# Altium PCB PCB1.PcbDoc
Units mil, origin at the board's own origin, x right, y up, seen from the top; angles counter-clockwise.
Board outline 1080.03 x 2490.03 mil, 2 copper layers (Top Layer, Bottom Layer); 17 components, 9 nets, 97 pads, 7 vias.
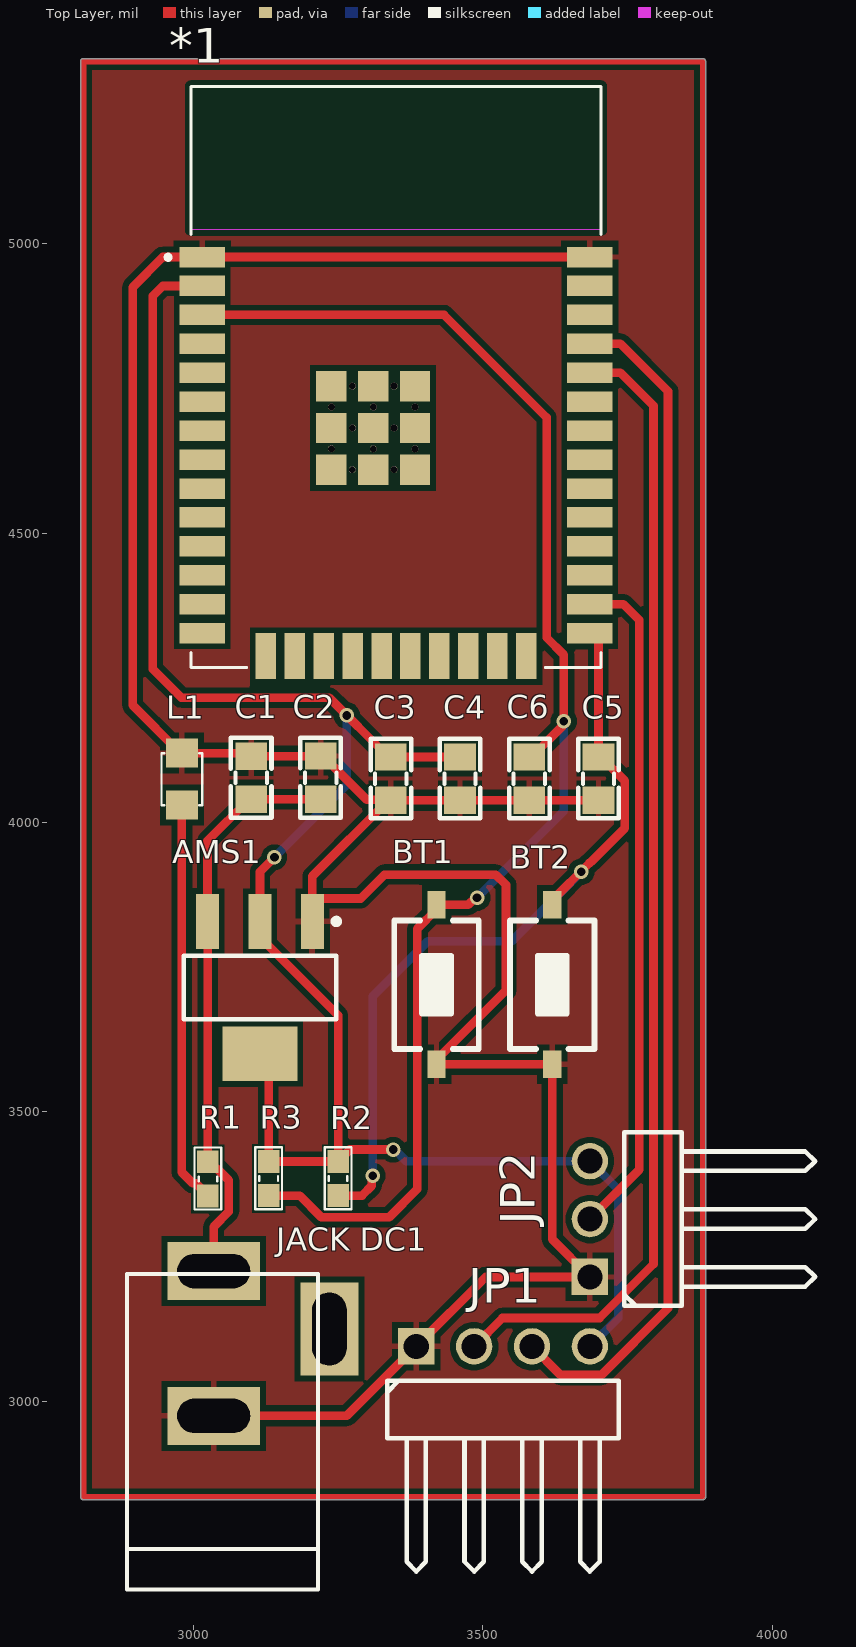
[diagram p0: Top Layer view]
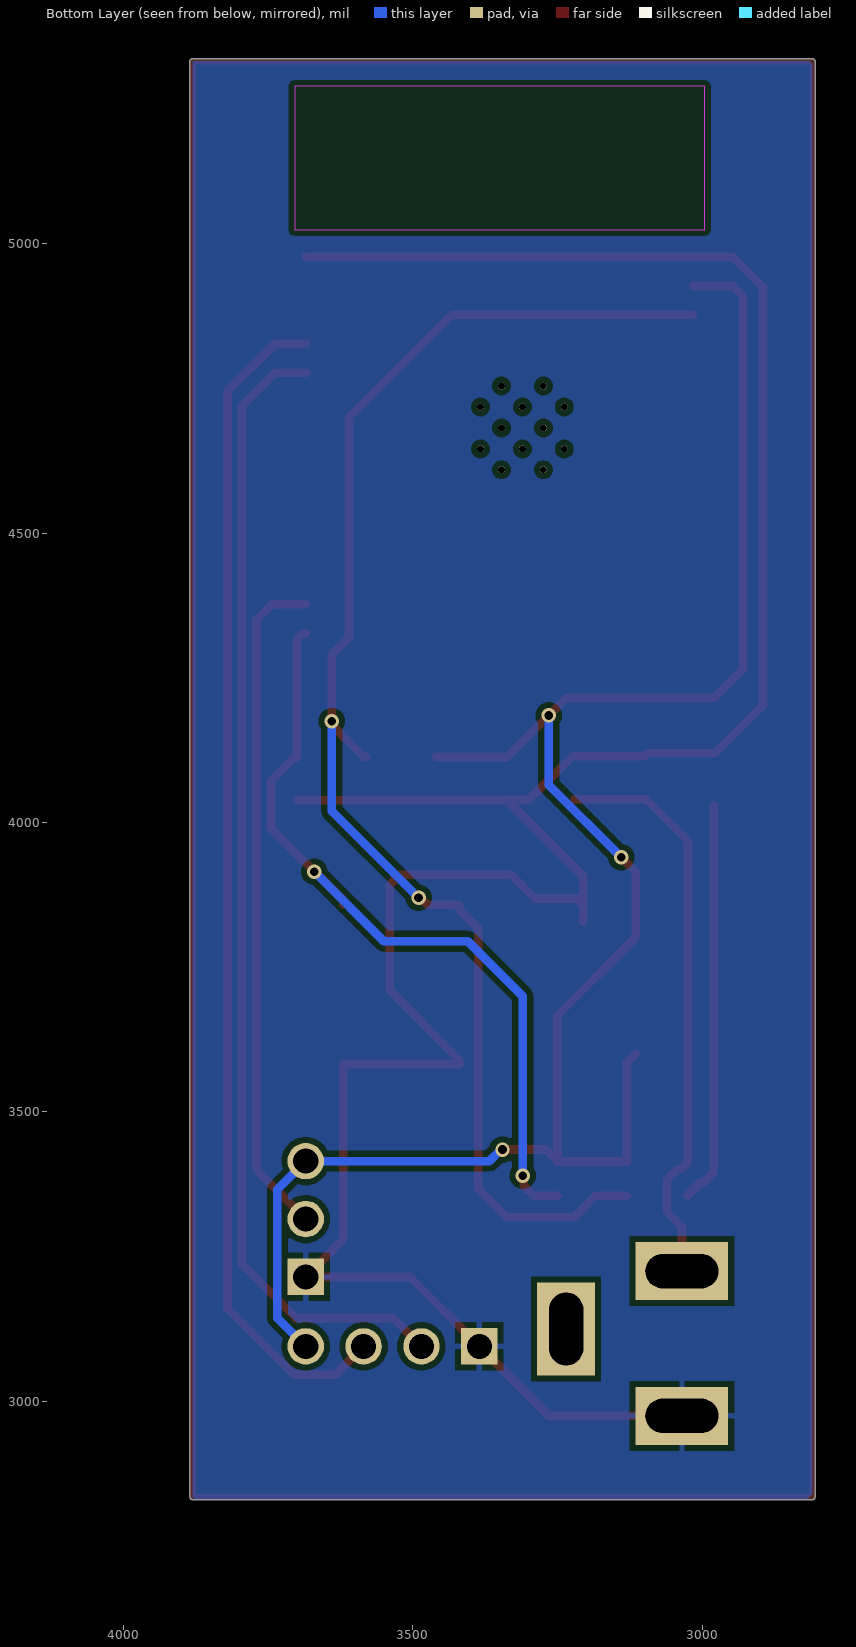
[diagram p1: Bottom Layer view, seen from below]
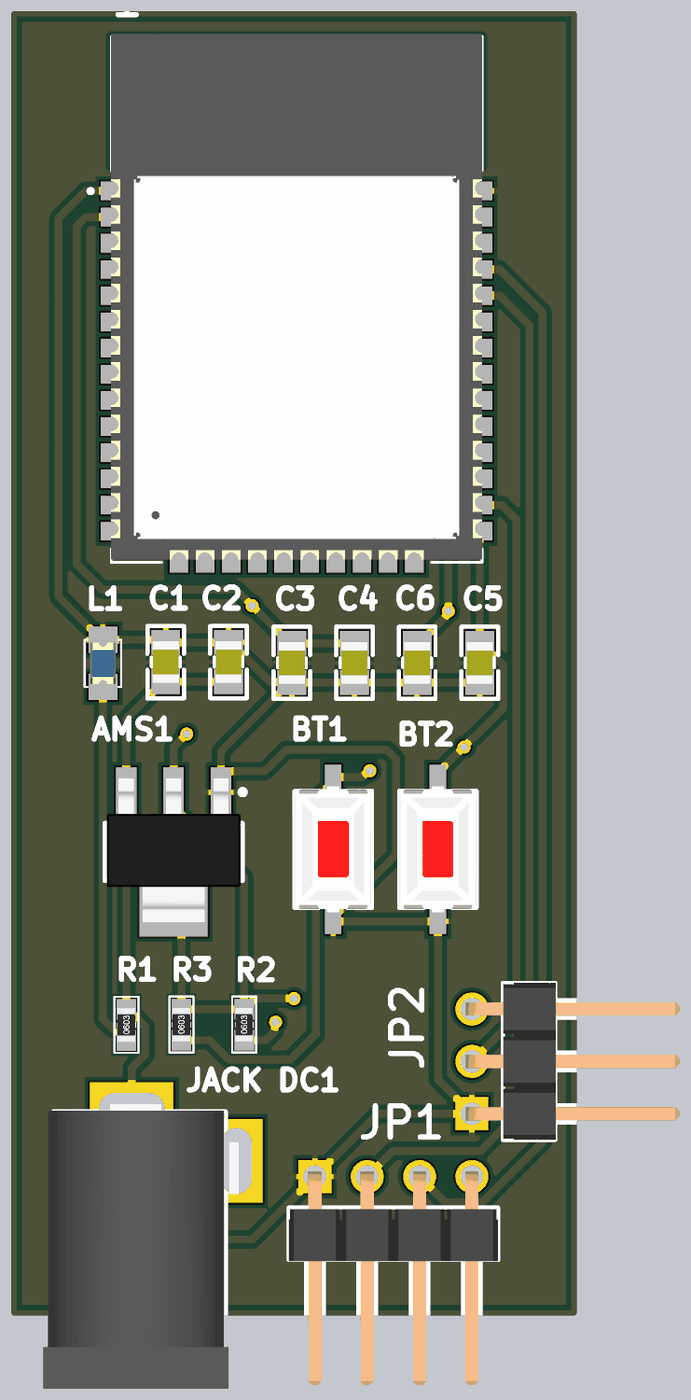
[diagram p2: 3D render of the assembled board from above, using the file's embedded part models]

## Layer stack, top to bottom
Top Solder: solder mask 0.4, Solder Resist, Dk 3.5
Top Layer: signal copper 1.4
Dielectric 1: dielectric 12.6, FR-4, Dk 4.8
Bottom Layer: signal copper 1.4
Bottom Solder: solder mask 0.4, Solder Resist, Dk 3.5

## Board outline
2810,2829.99 cw(c2810,2835) 2804.99,2835 2804.99,5315 cw(c2810,5315) 2810,5320.02 3880,5320.02 cw(c3880,5315) 3885.01,5315 3885.01,2835 cw(c3880,2835) 3880,2829.99

## Design rules (kind name [scope] priority, off if disabled: settings)
Clearance [All] p1: gap=10 ignorepadtopadclearanceinfootprint=FALSE
PolygonConnect [All] p1: connectstyle=Relief reliefconductorwidth=10 reliefentries=4 polygonreliefangle="90 Angle" airgapwidth=10
RoutingVias [All] p1: holewidth=28 width=50 viastyle="Through Hole" minholewidth=15 minwidth=25 maxholewidth=45 maxwidth=45
SolderMaskExpansion [All] p1: expansion=4 istentingtop=FALSE
Width [All] p1: maxlimit=50 minlimit=15 preferedwidth=25
30 further rules are at their usual default settings.

## Classes and differential pairs
component class Sheet1: *1 AMS1 BT1 BT2 C4 "JACK DC1" JP1 JP2 L1 R1 R2 R3

## Components (designator, comment, footprint, x,y, rotation, side; value= is the part's Value field where it differs from the comment)
*1 "ESP32 WROOM 32" ESP32-WROOM-32D 3350,4770 r0 top
AMS1 "AMS1117-3.3V" SOT223 3115,3715 r180 top value="AMS1117-3.3V SOT223"
BT1 "Nut Nhan 2 Chan SMD 3x6x2.5" "Nut Nhan 2 Chan SMD 3x6x2.5" 3420,3720 r90 top
BT2 "Nut Nhan 2 Chan SMD 3x6x2.5" "Nut Nhan 2 Chan SMD 3x6x2.5" 3620,3720 r90 top
C1 "106" "tu 0805" 3099.87,4077.23 r90 top
C2 "104" "tu 0805" 3219.87,4077.43 r90 top
C3 "106" "tu 0805" 3341.04,4076.06 r270 top
C4 "104" "tu 0805" 3460.73,4076.06 r270 top
C5 "104" "tu 0805" 3700.13,4076.06 r270 top
C6 "104" "tu 0805" 3580.43,4076.06 r270 top
"JACK DC1" "JACK DC 5.5" "JACK DC 5.5" 3135,3100 r90 top value="Jac DC"
JP1 "JP 1x4 2.54" "JP 1x4 DC" 3735,2995 r0 top
JP2 "JP 1x3 2.54" "JP 1x3 DC" 3785,3465 r90 top
L1 "LED 0805" LED-0805-Blue 2980,4030 r90 top
R1 "1k" "tro smd 0603" 3025,3384.53 r90 top
R2 "10k" "tro smd 0603" 3250,3385 r90 top
R3 "10k" "tro smd 0603" 3130,3385 r90 top

## Footprints (in the part's own frame and the unit in brackets; to place one, negate y for a bottom-side part, rotate by r counter-clockwise, add the part's x,y. Pads: shape width x height; smd on the part's side, far side on the other; paste and mask are expansions set on the pad)
ESP32-WROOM-32D [mm]
  rect 2x0.9 smd: 1(-8.5,5.26) 2(-8.5,3.99) 3(-8.5,2.72) 4(-8.5,1.45) 5(-8.5,0.18) 6(-8.5,-1.09) 7(-8.5,-2.36) 8(-8.5,-3.63) 9(-8.5,-4.9) 10(-8.5,-6.17) 11(-8.5,-7.44) 12(-8.5,-8.71) 13(-8.5,-9.98) 14(-8.5,-11.25) 25(8.5,-11.25) 26(8.5,-9.98) 27(8.5,-8.71) 28(8.5,-7.44) 29(8.5,-6.17) 30(8.5,-4.9) 31(8.5,-3.63) 32(8.5,-2.36) 33(8.5,-1.09) 34(8.5,0.18) 35(8.5,1.45) 36(8.5,2.72) 37(8.5,3.99) 38(8.5,5.26)
  rect 0.9x2 smd: 15(-5.715,-12.25) 16(-4.445,-12.25) 17(-3.175,-12.25) 18(-1.905,-12.25) 19(-0.635,-12.25) 20(0.635,-12.25) 21(1.905,-12.25) 22(3.175,-12.25) 23(4.445,-12.25) 24(5.715,-12.25)
  rect 1.33x1.33 smd: 39(-2.835,-4.075) 39(-2.835,-2.24) 39(-2.835,-0.405) 39(-1,-4.075) 39(-1,-2.24) 39(-1,-0.405) 39(0.835,-4.075) 39(0.835,-2.24) 39(0.835,-0.405)
  round 0.3 hole 0.3: 39(-2.835,-3.157) 39(-2.835,-1.322) 39(-1.917,-4.075) 39(-1.917,-2.24) 39(-1.917,-0.405) 39(-1,-3.157) 39(-1,-1.322) 39(-0.082,-4.075) 39(-0.082,-2.24) 39(-0.082,-0.405) 39(0.835,-3.157) 39(0.835,-1.322)
  Keep-Out Layer region: 9,6.45 -9,6.45 -9,12.75 9,12.75
  Keep-Out Layer region: 9,6.45 -9,6.45 -9,12.75 9,12.75
  silkscreen extent -10.1,-12.75 9,12.75, body extent -9,-12.62 9,12.88, height 3.2
"JACK DC 5.5" [mil] "Jac DC input"
  rect 100x160 hole 59.06 slot 125.98 at 90 deg: 1(125,100) 2(-125,100)
  rect 160x100 hole 59.06 slot 125.98 at 0 deg: 3(25,-100)
  silkscreen extent -425,-80 120,250, body extent -410,-105 134,269, height 434
"JP 1x3 DC" [mm]
  rect 1.6x1.6 hole 1.1: 1(-6.35,2.54)
  round 1.6 hole 1.1: 2(-3.81,2.54) 3(-1.27,2.54)
  silkscreen extent -7.62,-7.34 0,1.04, body extent -7.62,-7.52 0,2.84, height 2.55
"JP 1x4 DC" [mm] "4 pins, 1 row, right angled, gold plating"
  rect 1.6x1.6 hole 1.1: 1(-8.89,2.54)
  round 1.6 hole 1.1: 2(-6.35,2.54) 3(-3.81,2.54) 4(-1.27,2.54)
  silkscreen extent -10.16,-7.34 0,1.04, body extent -10.16,-7.57 0,2.79, height 2.54
LED-0805-Blue [mil]
  rect 50x55 smd: 1(0,0) 2(90,0)
  silkscreen extent 0,-35 90,35, body extent 5,-25 85,25, height 43
"Nut Nhan 2 Chan SMD 3x6x2.5" [mm] "Switch SMD type"
  rect 1.2x0.8 smd: 1(-3.5,0) 2(3.5,0)
  silkscreen extent -2.82,-1.85 2.82,1.85, body extent -3.05,-1.85 3.05,1.85, height 2.5
SOT223 [mm]
  rect 1x2.4 smd: 1(-2.3,-2.9) 2(0,-2.9) 3(2.3,-2.9)
  rect 3.3x2.4 smd: 4(0,2.9)
  silkscreen extent -3.48,-3.02 3.35,1.4, body extent -3.25,-3.56 3.25,3.4, height 1.68
"tro smd 0603" [mm] "Chip Capacitor, 2-Leads, Body 1,60x0,80mm, IPC Medium Density"
  rect 1x0.95 smd mask+0.076: 1(-0.75,0) 2(0.75,0)
  silkscreen extent -1.35,-0.58 1.37,0.58, body extent -0.82,-0.42 0.82,0.43, height 0.44
"tu 0805" [mm] "Compoment SMD 80x50mil"
  rect 1.2x1.4 smd: 1(-0.946,-0.003) 2(0.954,-0.003)
  silkscreen extent -1.75,-0.89 1.75,0.89, body extent -1.01,-0.64 1.01,0.63, height 0.61

## Part data
AMS1: library part "AMS1117 SMD", "Dán", Chung_Loai=Dán, Don_Vi=Con, Ma_Hang=MH000596
C1 C3: library part "Tu 0805 106 16V 10%", "Dán", Chung_Loai=Dán, Don_Vi=Con, Ma_Hang=MH004553, So_Chan=2, Ten_Linh_Kien="Tụ 0805 106-10uF 10% 16V"
C2 C4 C5 C6: library part "Tu 0805 104 50V 10%", "Dán", Chung_Loai=Dán, Don_Vi=Con, Ma_Hang=MH004551, So_Chan=2, Ten_Linh_Kien="Tụ 0805 104-100nF 10% 50V"
JP1: library part "JP 1x4 2.54 Duc Cong", "Cắm", Chung_Loai=Cắm, Don_Vi=Con, Ma_Hang=MH000904, Ten_Linh_Kien="Jump Đơn Đực 2.54MM 1x40P Cong Đứng"
JP2: library part "JP 1x3 2.54 Duc Cong", "Cắm", Chung_Loai=Cắm, Don_Vi=Con, Ma_Hang=MH000904, Ten_Linh_Kien="Jump Đơn Đực 2.54MM 1x40P Cong Đứng"
L1: library part "LED 0805 Xanh Duong", "Dán", Chung_Loai=Dán, Don_Vi=Con, Ma_Hang=MH002327, Ten_Linh_Kien="LED 0805 Màu Xanh Dương (Blue)"
R1: library part "Tro 0603 1% 1k", "Dán", Chung_Loai=Dán, Don_Vi=Con, Ma_Hang=MH006334, So_Chan=2, Ten_Linh_Kien="Trở 0603 1% 1k"
R2 R3: library part "Tro 0603 1% 10k", "Dán", Chung_Loai=Dán, Don_Vi=Con, Ma_Hang=MH006333, So_Chan=2, Ten_Linh_Kien="Trở 0603 1% 10k"
BT1 BT2: Ma_Hang=MH001036, Ten="Nút Nhấn 2 Chân 3x6x2.5MM SMD"

## Via types
v1: diameter 25, hole 15, Top Layer to Bottom Layer, 7 vias

## Nets (pads, with @x,y where several pads share a name; then routed paths per layer and width w, separated by ;. In a path a pad name is that pad's centre, name@x,y a point inside that pad or via, vN(x,y) a via of type N, cw(c..) or ccw(c..) an arc to the next point about the centre after c; other vN are vias at no path point)
3.3V: *1.2 AMS1.2 AMS1.4 C3.1 C4.1 JP1.4 JP2.3 R2.2 R3.2 | length 3343.9
  Top Layer w15: *1.2 2947.09,4927.09 2930,4910 2930,4265 2979.23,4215.77 3234.49,4215.77 3336.96,4113.29 C3.1 C4.1 ; AMS1.4 3130,3585.83 R3.2 R2.2 R2.2@3250,3415.51 ; v1(3140,3940) 3115,3915 AMS1.2 3115,3801.61 3250,3666.61 R2.2@3250,3415.51 ; v1(3345,3435) 3270.47,3435 3262.19,3426.71 3261.2,3426.71 R2.2@3250,3415.51
  Bottom Layer w15: v1(3140,3940) 3265,4065 v1(3265,4185) ; v1(3345,3435) 3347.71,3435 3367.71,3415 JP2.3 3734,3366 3734,3144 JP1.4
EN: *1.3 BT1.2 C6.1 R3.1 | length 2533.4
  Top Layer w15: *1.3 3432.91,4877.09 3610.22,4699.78 3610.22,4319.68 3640,4289.9 v1(3640,4175) 3638.09,4173.09 3638.09,4167.14 3584.24,4113.29 C6.1 ; R3.1 3183.89,3355.47 3221.08,3318.29 3338.29,3318.29 3386.75,3366.75 3386.75,3816.67 3420,3849.92 BT1.2 3475.09,3857.8 3487.29,3870 v1(3490,3870)
  Bottom Layer w15: v1(3490,3870) 3640,4020 v1(3640,4175)
GND: "JACK DC1.2" *1.1 *1.38 AMS1.1 BT1.1 BT2.1 C1.2 C2.2 C3.2 C4.2 C5.2 C6.2 JP1.1 JP2.1 L1.2 | length 4741.6
  Top Layer w15: 3035,2975 3265,2975 JP1.1 3505,3215 JP2.1 3620,3280 BT2.1 BT1.1 3420,3590.08 3540,3710.08 3540,3892.43 3522.43,3910 3330,3910 3288.92,3868.92 3217.74,3868.92 AMS1.1@3205.55,3856.73 ; AMS1.1 AMS1.1@3205.55,3856.73 ; *1.38 *1.1 2947.09,4977.09 2895,4925 2895,4202.5 2977.5,4120 L1.2 3094.8,4120 C1.2 3224.13,4114.8 3299.63,4039.31 3340.08,4039.31 C3.2 ; C5.2 C6.2 C4.2 C3.2 ; AMS1.1@3205.55,3856.73 3205.55,3907.08 3336.96,4038.49 C3.2
IO0: *1.25 BT2.2 C5.1 R2.1 | length 1390.2
  Top Layer w15: R2.1 3291.2,3355.47 3308.09,3372.36 3308.09,3388.09 v1(3310,3390) ; BT2.2 3620,3865.67 3684.33,3930 ; *1.25 3689.78,4327.09 3700,4316.87 C5.1 3703.94,4113.29 3745.06,4072.17 3745.06,3990.06 3687.5,3932.5
  Bottom Layer w15: v1(3310,3390) 3310,3700 3405,3795 3550,3795 v1(3670,3915)
IO4: *1.26 JP2.2 | length 1166.8
  Top Layer w15: *1.26 3742.91,4377.09 3770.06,4349.94 3770.06,3400.06 JP2.2
NetL1_1: L1.1 R1.1 | length 696.6
  Top Layer w15: L1.1 2980,3395.92 2999.05,3376.87 3004.11,3376.87 3025,3355.98 R1.1
RXD: *1.34 JP1.2 | length 1985.9
  Top Layer w15: JP1.2 3534,3144 3701.74,3144 3795.06,3237.32 3795.06,4719.94 3737.73,4777.27 3684.83,4777.27 *1.34
TXD: *1.35 JP1.3 | length 2056.7
  Top Layer w15: JP1.3 3634,3046 3705.29,3046 3820.06,3160.77 3820.06,4744.94 3737.73,4827.27 3684.83,4827.27 *1.35
VCC: "JACK DC1.1" AMS1.3 C1.1 C2.1 R1.2 | length 997.7
  Top Layer w15: 3035,3225 3035,3301.87 3061.2,3328.07 3061.2,3381.93 3041.26,3401.87 3036.2,3401.87 3024.72,3413.35 3024.72,3828.9 AMS1.3 3024.45,3968.39 3096.06,4040 C1.1 3219.8,4040 C2.1
pads on no net: "JACK DC1.3" *1.4 *1.5 *1.6 *1.7 *1.8 *1.9 *1.10 *1.11 *1.12 *1.13 *1.14 *1.15 *1.16 *1.17 *1.18 *1.19 *1.20 *1.21 *1.22 *1.23 *1.24 *1.27 *1.28 *1.29 *1.30 *1.31 *1.32 *1.33 *1.36 *1.37 *1.39
copper on no net: | length 7100
  Top Layer w10: 2810,2835 3880,2835 3880,5315 2810,5315 2810,2835

## Polygon pours and split planes (outlines as drawn)
GND on Top Layer "GND_L01_P000" (solid, pour order 0): 2810,5315 3880,5315 3880,2835 2810,2835
GND on Bottom Layer "GND_L02_P001" (solid, pour order 1): 2810,5310 2815,5315 3880,5315 3880,2835 3875,2830 2820,2830 2810,2840

## Text inside footprints (layer, text, board x,y; h text height)
*1: Mechanical 13 "ANTENNA" at 3113.78,5124.33 h70